# EAGLE board module_generic_top_board (EAGLE 7.5.0)
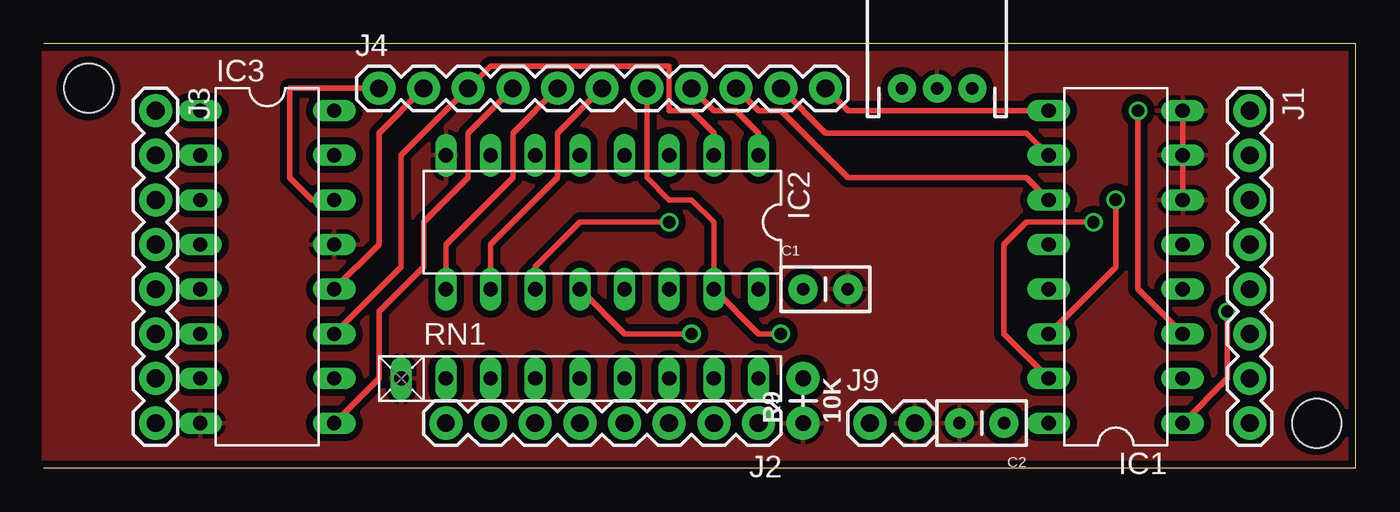
[diagram p0: board, top side]
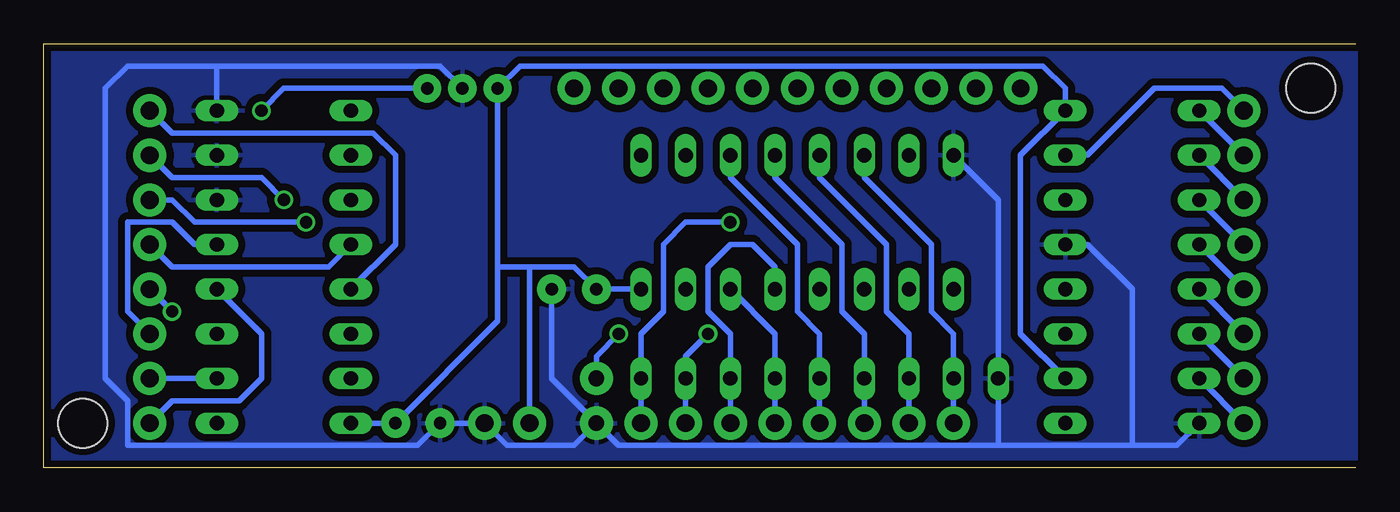
[diagram p1: board, bottom side, seen from below]

Size 74.6 x 24.12 mm. Coordinates in mm from the lower left corner, seen from the top.
Outline: 0,0 74.6,0 74.6,24.12 0,24.12
Copper layers (1*16): Top 0.0356mm / dielectric 1.5011mm / Bottom 0.0356mm
Design rules "LaenPCBOrder": minimum track width 6mil, minimum drill 13mil, track to track 6mil, track to pad 6mil, pad to pad 6mil, via to via 6mil, smd to smd 6mil, copper to edge 15mil, drill to drill 6mil, minimum pad ring 7mil, minimum via ring 7mil, stop-mask expansion 3mil, vias tented up to drill 0mil, thermal gap 10mil
Holes 2.8 mm at 2.54,21.59 72.39,2.54

## Footprints (pad centres in the part's own frame; a part is rotated, then mirrored left to right if it is on the bottom)
CAP-PTH-SMALLEZ = drill 0.7 pad 1.651: 1 0,0; 2 2.54,0
DIL16 = drill 0.813 long: 1 -8.89,-3.81; 2 -6.35,-3.81; 3 -3.81,-3.81; 4 -1.27,-3.81; 5 1.27,-3.81; 6 3.81,-3.81; 7 6.35,-3.81; 8 8.89,-3.81; 9 8.89,3.81; 10 6.35,3.81; 11 3.81,3.81; 12 1.27,3.81; 13 -1.27,3.81; 14 -3.81,3.81; 15 -6.35,3.81; 16 -8.89,3.81
1X08_ROUND = drill 1.016 pad 1.88: 1 0,0; 2 2.54,0; 3 5.08,0; 4 7.62,0; 5 10.16,0; 6 12.7,0; 7 15.24,0; 8 17.78,0
1X11 = drill 1.016 pad 1.88: 1 0,0; 2 2.54,0; 3 5.08,0; 4 7.62,0; 5 10.16,0; 6 12.7,0; 7 15.24,0; 8 17.78,0; 9 20.32,0; 10 22.86,0; 11 25.4,0
JST-3-PTH = drill 0.7 pad 1.6: 1 -2,0; 2 0,0; 3 2,0
1X02 = drill 1.016 pad 1.88: 1 0,0; 2 2.54,0
AXIAL-0.1 = drill 0.9 pad 1.88: P$1 0,0; P$2 2.54,0
RN-9 = drill 0.813 long: 1 -10.16,0; 2 -7.62,0; 3 -5.08,0; 4 -2.54,0; 5 0,0; 6 2.54,0; 7 5.08,0; 8 7.62,0; 9 10.16,0

## Placement (x,y rotation side)
C1  0.1uF  [CAP-PTH-SMALLEZ]  43.18,10.16 0 top
C2  0.1uF  [CAP-PTH-SMALLEZ]  54.61,2.54 180 top
IC1  4051N  [DIL16]  60.96,11.43 90 top
IC2  74HC165N  [DIL16]  31.75,13.97 180 top
IC3  74HC595N  [DIL16]  12.7,11.43 270 top
J1  [1X08_ROUND]  68.58,20.32 270 top
J2  [1X08_ROUND]  40.64,2.54 180 top
J3  [1X08_ROUND]  6.35,20.32 270 top
J4  [1X11]  19.05,21.59 0 top
J8  [JST-3-PTH]  50.8,21.59 0 top
J9  [1X02]  46.99,2.54 0 top
R9  10K  [AXIAL-0.1]  43.18,2.54 90 top
RN1  [RN-9]  30.48,5.08 0 top

## Library data of the parts
C1 C2 = SparkFun-Capacitors
IC1 = 40xx
IC2 IC3 = 74xx-eu
J1-J3 = SparkFun-Connectors; PROD_ID: CONN-08437
J4 J9 = SparkFun-Connectors
J8 = SparkFun-Connectors; SKU: PRT-09915
R9 = SparkFun-Resistors
RN1 = resistor-net; OC_FARNELL: unknown; OC_NEWARK: unknown

## Nets
GND: C1.2 C2.2 IC1.6 IC1.7 IC1.8 IC2.8 IC3.8 IC3.13 J8.2 J9.2 R9.P$1 RN1.1
INH: IC2.15 J4.7 R9.P$2
MUX_X0: IC1.13 J1.1
MUX_X1: IC1.14 J1.2
MUX_X2: IC1.15 J1.3
MUX_X3: IC1.12 J1.4
MUX_X4: IC1.1 J1.5
MUX_X5: IC1.5 J1.6
MUX_X6: IC1.2 J1.7
MUX_X7: IC1.4 J1.8
N$1: IC2.9 J4.5
N$2: IC2.10 J4.6
N$3: IC2.1 J4.8
N$4: IC3.14 J4.1
N$5: IC3.12 J4.2
N$6: IC2.11 J2.1 RN1.9
N$7: IC3.9 J4.4
N$8: IC1.9 J4.11
N$9: IC1.10 J4.10
N$10: IC1.11 J4.9
N$11: IC2.12 J2.2 RN1.8
N$12: IC2.13 J2.3 RN1.7
N$13: IC2.14 J2.4 RN1.6
N$14: IC2.3 J2.5 RN1.5
N$15: IC2.4 J2.6 RN1.4
N$16: IC2.5 J2.7 RN1.3
N$17: IC3.15 J3.1
N$18: IC3.1 J3.2
N$19: IC3.2 J3.3
N$20: IC3.3 J3.4
N$21: IC3.4 J3.5
N$22: IC3.5 J3.6
N$23: IC3.6 J3.7
N$24: IC3.7 J3.8
N$25: IC1.3 J8.3
N$26: IC2.6 J2.8 RN1.2
SCK_CLK: IC2.2 IC3.11 J4.3
VCC: C1.1 C2.1 IC1.16 IC2.16 IC3.10 IC3.16 J8.1 J9.1

## Tracks (layer width: path | path; a pad name or v marks a point on that pad's centre or on a via)
GND
  Top 0.305: IC1.8 IC1.7 IC1.6
  Bottom 0.305: 64.77,22.86 69.85,22.86 71.12,21.59 71.12,5.08 69.85,3.81 69.85,1.27 53.34,1.27 C2.2 J9.2 48.26,1.27 44.45,1.27 R9.P$1 | 64.77,22.86 52.07,22.86 J8.2 | R9.P$1 41.91,1.27 20.32,1.27 | 20.32,1.27 RN1.1 20.32,15.24 IC2.8 | 20.32,1.27 12.7,1.27 | IC3.8 10.16,1.27 12.7,1.27 | 12.7,1.27 12.7,10.16 15.24,12.7 IC3.13 | R9.P$1 45.72,5.08 C1.2 | 64.77,22.86 IC1.8
  pour Bottom (isolate 0.406): 0,0 0,24.13 74.93,24.13 74.93,0
  pour Top (isolate 0.406): 0,0 0,24.13 74.93,24.13 74.93,0
INH  (via drill 0.7 pad 0.61)
  Top 0.305: J4.7 34.29,16.51 35.56,15.24 36.83,15.24 38.1,13.97 IC2.15 40.64,7.62 v41.91,7.62
  Bottom 0.305: v41.91,7.62 43.18,6.35 R9.P$2
MUX_X0
  Bottom 0.305: IC1.13 54.61,12.7 54.61,17.78 55.88,19.05 67.31,19.05 J1.1
MUX_X1  (via drill 0.7 pad 0.61)
  Top 0.305: IC1.14 60.96,11.43 v60.96,15.24
  Bottom 0.305: v60.96,15.24 62.23,16.51 67.31,16.51 J1.2
MUX_X2  (via drill 0.7 pad 0.61)
  Top 0.305: IC1.15 54.61,7.62 54.61,12.7 55.88,13.97 v59.69,13.97
  Bottom 0.305: v59.69,13.97 66.04,13.97 67.31,15.24 J1.3
MUX_X3
  Bottom 0.305: IC1.12 58.42,11.43 67.31,11.43 J1.4
MUX_X4  (via drill 0.7 pad 0.61)
  Top 0.305: IC1.1 67.31,5.08 v67.31,8.89
  Bottom 0.305: v67.31,8.89 J1.5
MUX_X5
  Bottom 0.305: IC1.5 66.04,12.7 67.31,13.97 69.85,13.97 69.85,8.89 J1.6
MUX_X6
  Bottom 0.305: IC1.2 J1.7
MUX_X7
  Bottom 0.305: IC1.4 62.23,7.62 62.23,5.08 63.5,3.81 67.31,3.81 J1.8
N$1
  Top 0.305: J4.5 26.67,19.05 26.67,16.51 22.86,12.7 IC2.9
N$2
  Top 0.305: J4.6 29.21,19.05 29.21,16.51 25.4,12.7 IC2.10
N$3
  Top 0.305: J4.8 38.1,20.32 39.37,20.32 40.64,19.05 IC2.1
N$4
  Top 0.305: J4.1 13.97,21.59 13.97,16.51 15.24,15.24 IC3.14
N$5
  Top 0.305: J4.2 19.05,19.05 19.05,12.7 IC3.12
N$6  (via drill 0.7 pad 0.61)
  Top 0.305: IC2.11 27.94,11.43 30.48,13.97 v35.56,13.97
  Bottom 0.305: v35.56,13.97 38.1,13.97 39.37,12.7 39.37,8.89 40.64,7.62 RN1.9 J2.1
N$7
  Top 0.305: J4.4 24.13,19.05 24.13,16.51 21.59,13.97 21.59,11.43 19.05,8.89 19.05,5.08 IC3.9
N$8
  Top 0.305: J4.11 45.72,20.32 IC1.9
N$9
  Top 0.305: J4.10 44.45,19.05 55.88,19.05 IC1.10
N$10
  Top 0.305: J4.9 40.64,20.32 41.91,20.32 45.72,16.51 55.88,16.51 IC1.11
N$11  (via drill 0.7 pad 0.61)
  Top 0.305: IC2.12 33.02,7.62 v36.83,7.62
  Bottom 0.305: v36.83,7.62 38.1,6.35 RN1.8 J2.2
N$12
  Bottom 0.305: IC2.13 33.02,11.43 34.29,12.7 35.56,12.7 36.83,11.43 36.83,8.89 35.56,7.62 RN1.7 J2.3
N$13
  Bottom 0.305: IC2.14 33.02,7.62 RN1.6 J2.4
N$14
  Bottom 0.305: IC2.3 35.56,16.51 31.75,12.7 31.75,8.89 30.48,7.62 RN1.5 J2.5
N$15
  Bottom 0.305: IC2.4 33.02,16.51 29.21,12.7 29.21,8.89 27.94,7.62 RN1.4 J2.6
N$16
  Bottom 0.305: IC2.5 30.48,16.51 26.67,12.7 26.67,8.89 25.4,7.62 RN1.3 J2.7
N$17
  Bottom 0.305: J3.1 7.62,21.59 11.43,21.59 15.24,17.78 IC3.15
N$18
  Bottom 0.305: IC3.1 J3.2
N$19
  Bottom 0.305: IC3.2 J3.3
N$20
  Bottom 0.305: IC3.3 J3.4
N$21
  Bottom 0.305: IC3.4 J3.5
N$22
  Bottom 0.305: IC3.5 J3.6
N$23
  Bottom 0.305: IC3.6 J3.7
N$24
  Bottom 0.305: IC3.7 J3.8
N$25  (via drill 0.7 pad 0.61)
  Top 0.305: IC1.3 62.23,10.16 v62.23,20.32
  Bottom 0.305: J8.3 60.96,21.59 v62.23,20.32
N$26
  Bottom 0.305: IC2.6 27.94,16.51 24.13,12.7 24.13,8.89 22.86,7.62 RN1.2 J2.8
SCK_CLK
  Top 0.305: IC3.11 20.32,11.43 20.32,17.78 J4.3 25.4,22.86 35.56,22.86 35.56,20.32 36.83,20.32 38.1,19.05 IC2.2
VCC
  Bottom 0.305: IC1.16 C2.1 48.8,8.35 48.8,11.43 | IC2.16 C1.1 44.45,11.43 46.99,11.43 | 46.99,11.43 48.8,11.43 | IC3.10 19.05,7.62 19.05,17.78 IC3.16 16.51,21.59 17.78,22.86 47.53,22.86 J8.1 48.8,11.43 | J9.1 46.99,11.43